# Altium PCB PCB4.PcbDoc (part 1 of 5)
Units mm, origin at the board's own origin, x right, y up, seen from the top; angles counter-clockwise.
Board outline 240 x 180 mm, 2 copper layers (Top Layer, Bottom Layer); 259 components, 311 nets, 1128 pads, 419 vias.
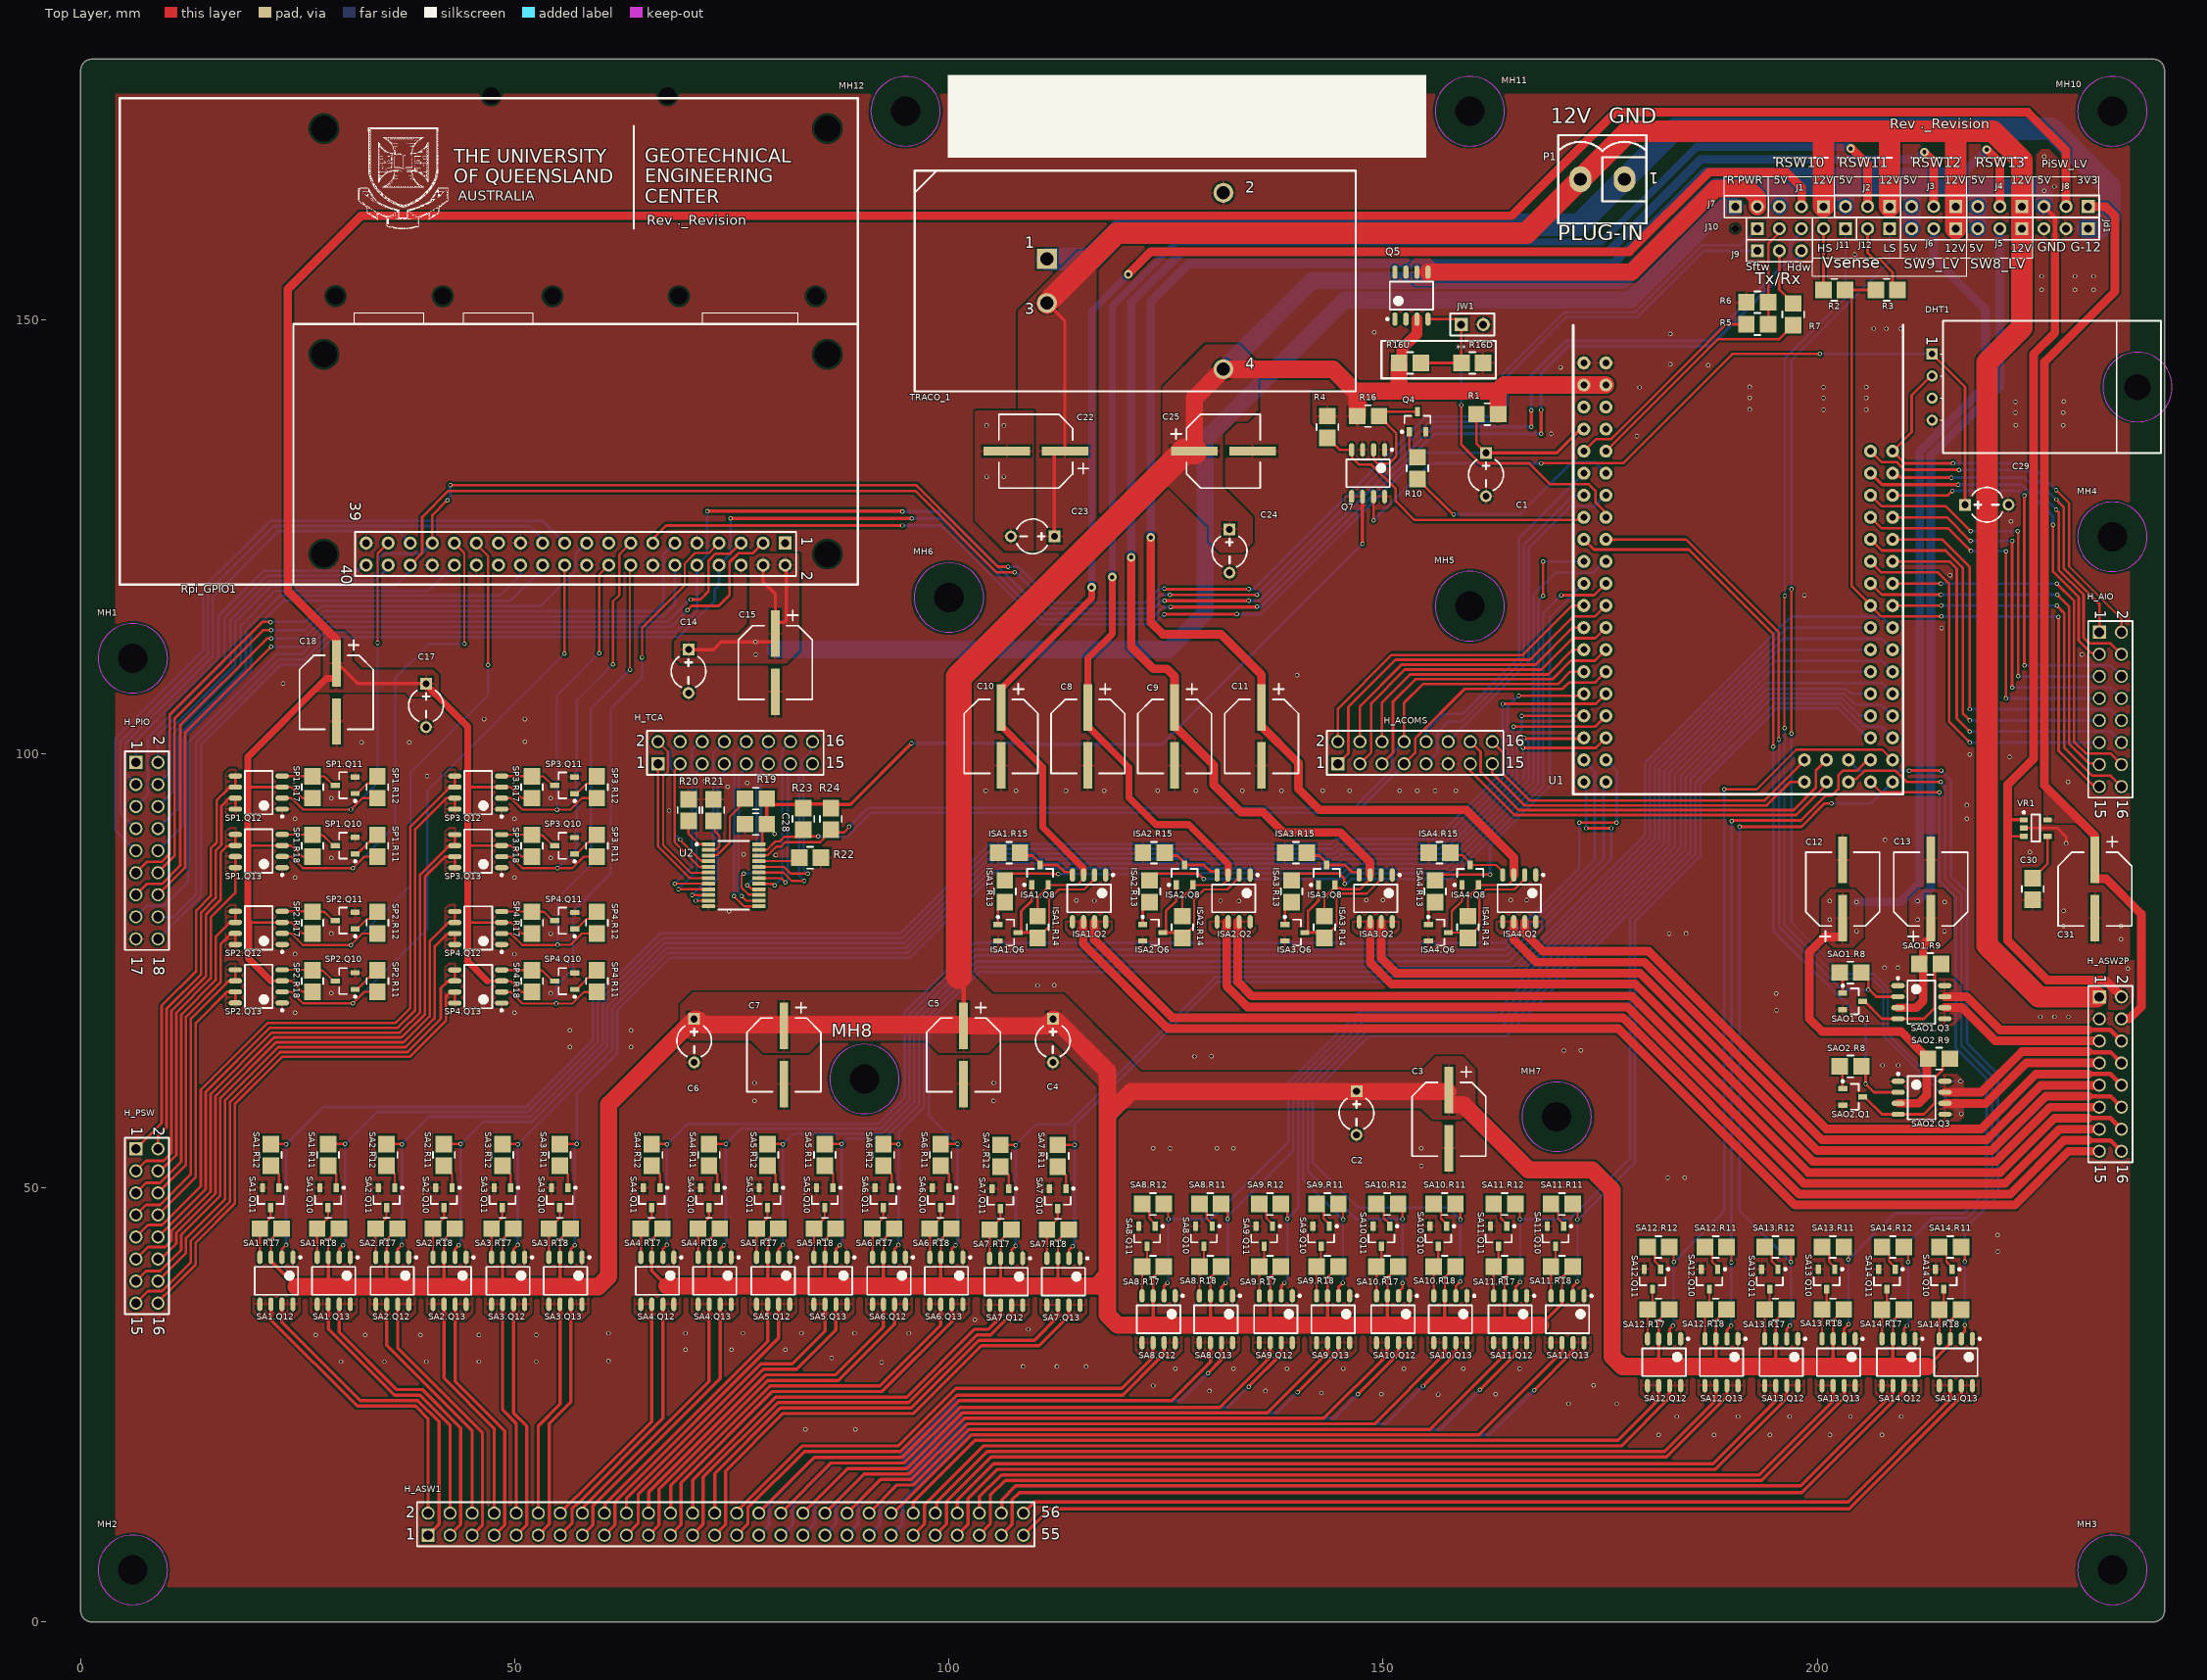
[diagram p0: Top Layer view]
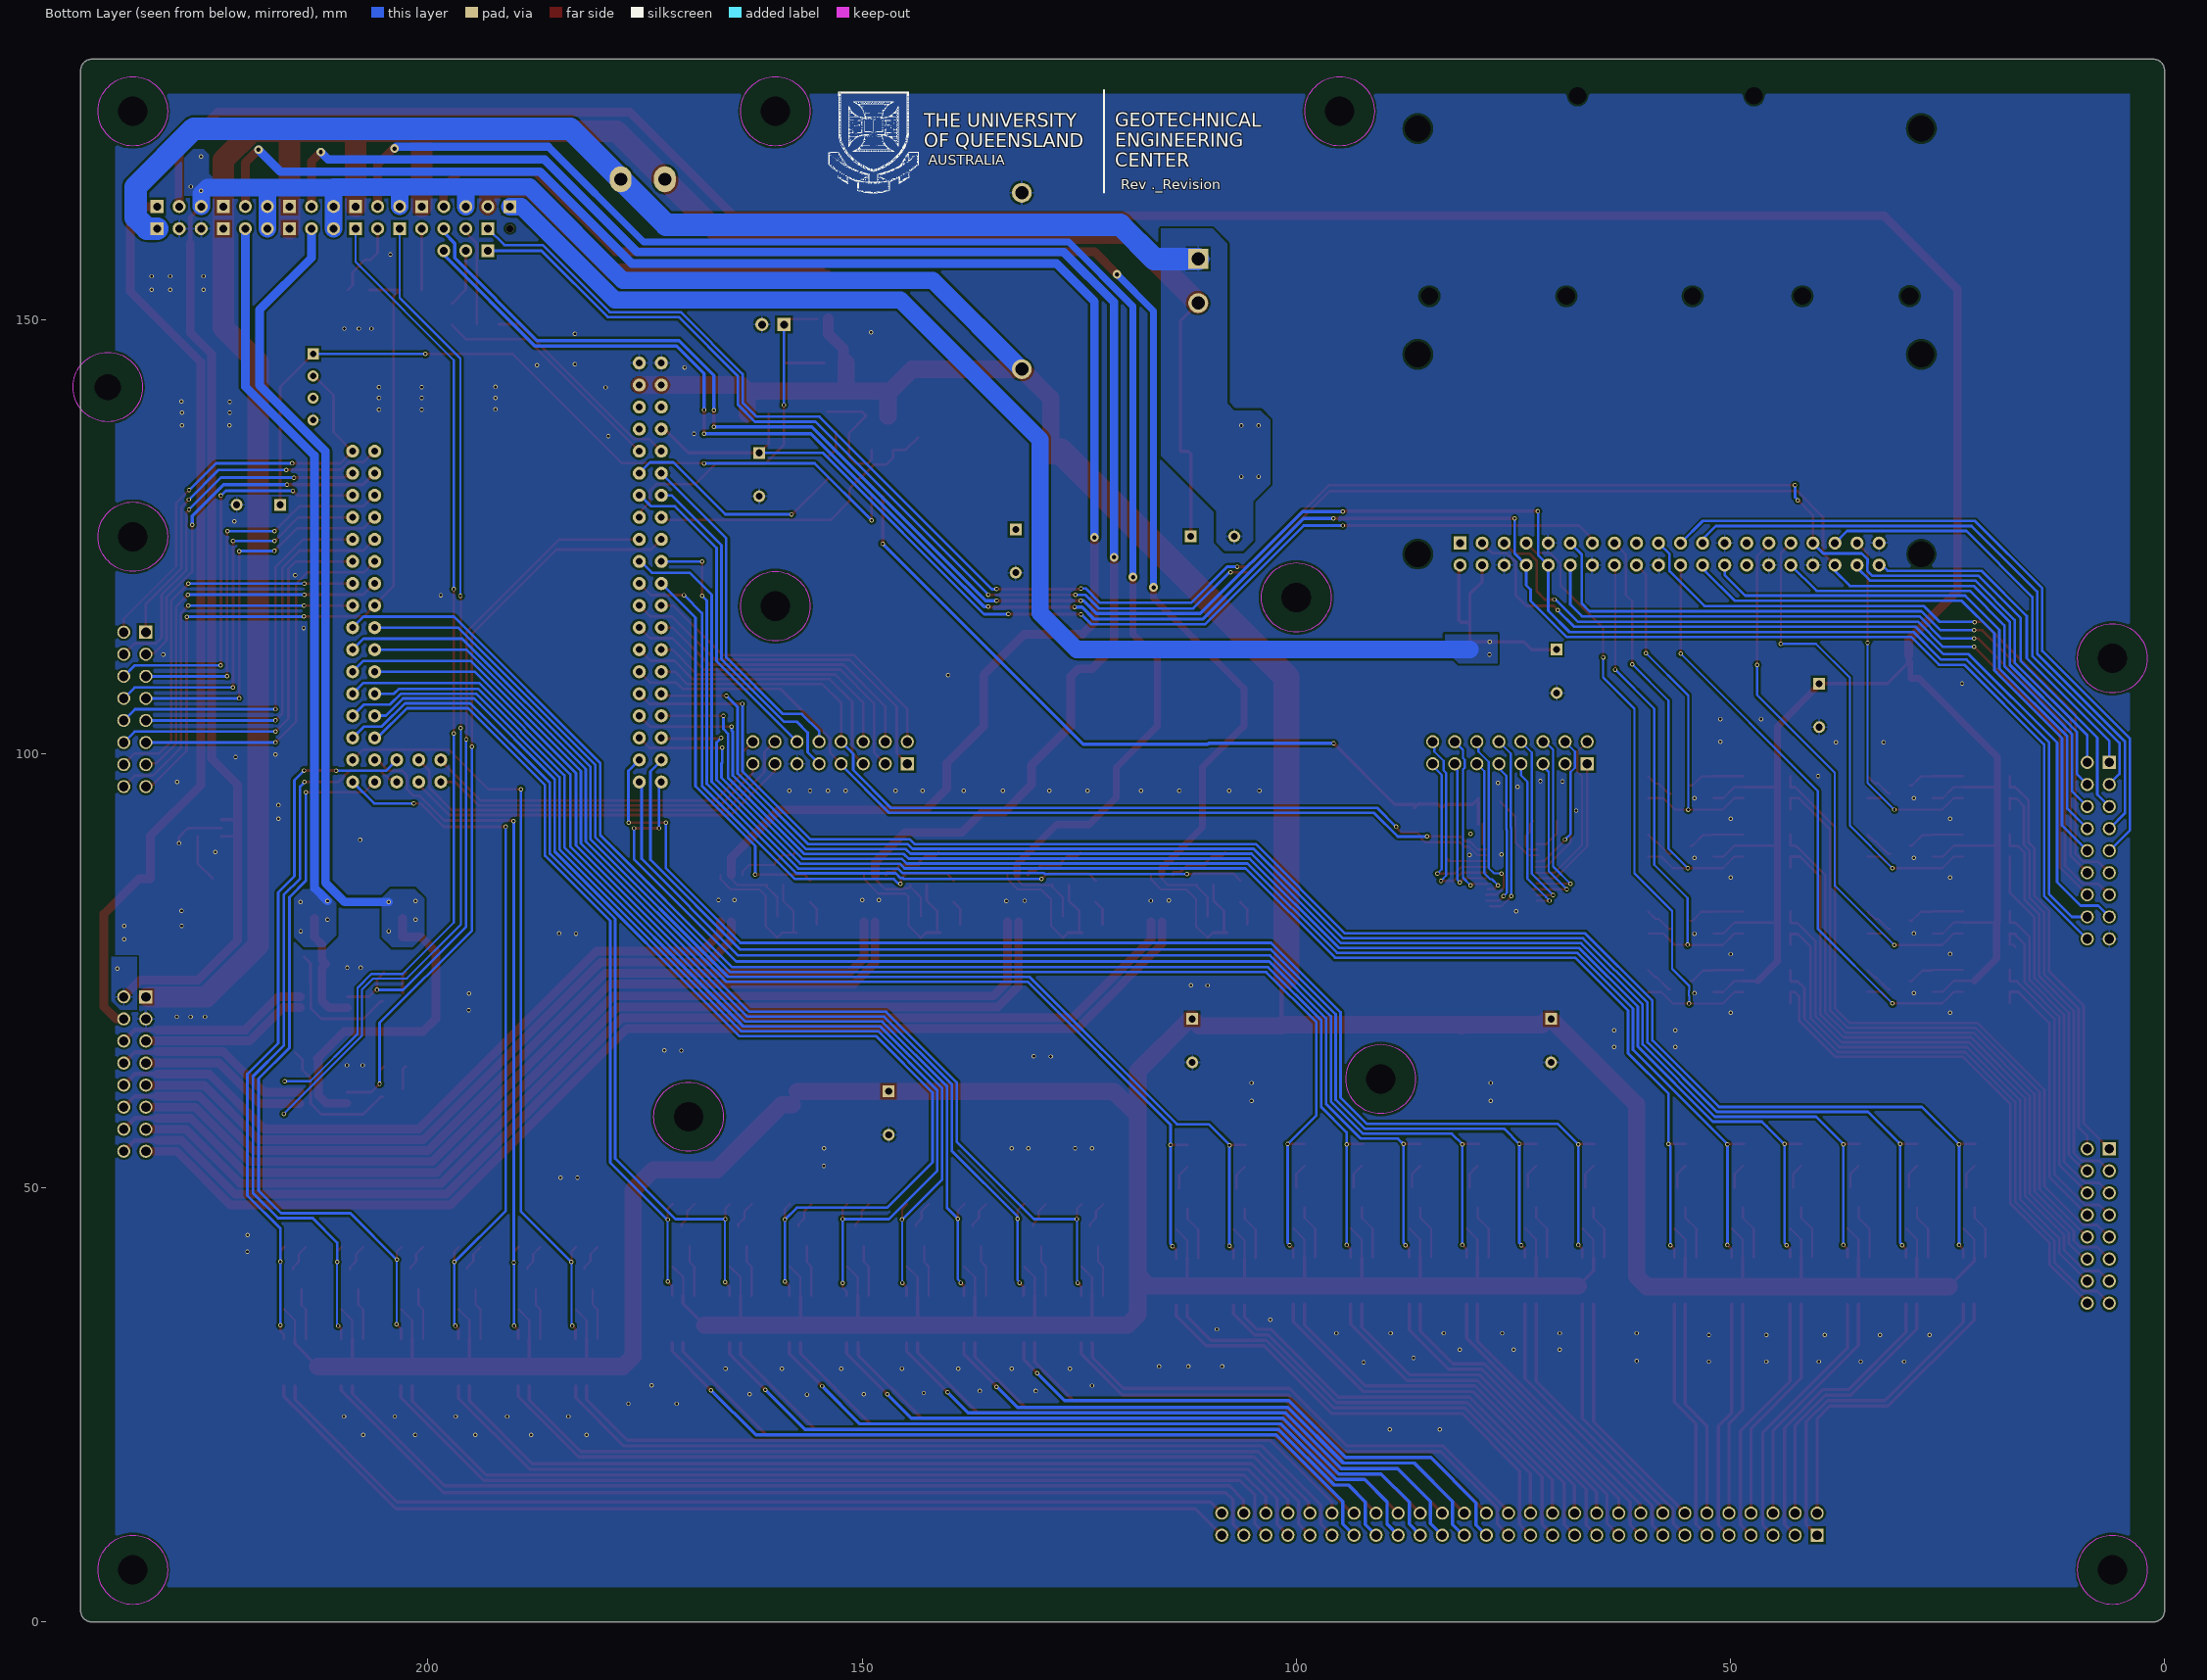
[diagram p1: Bottom Layer view, seen from below]
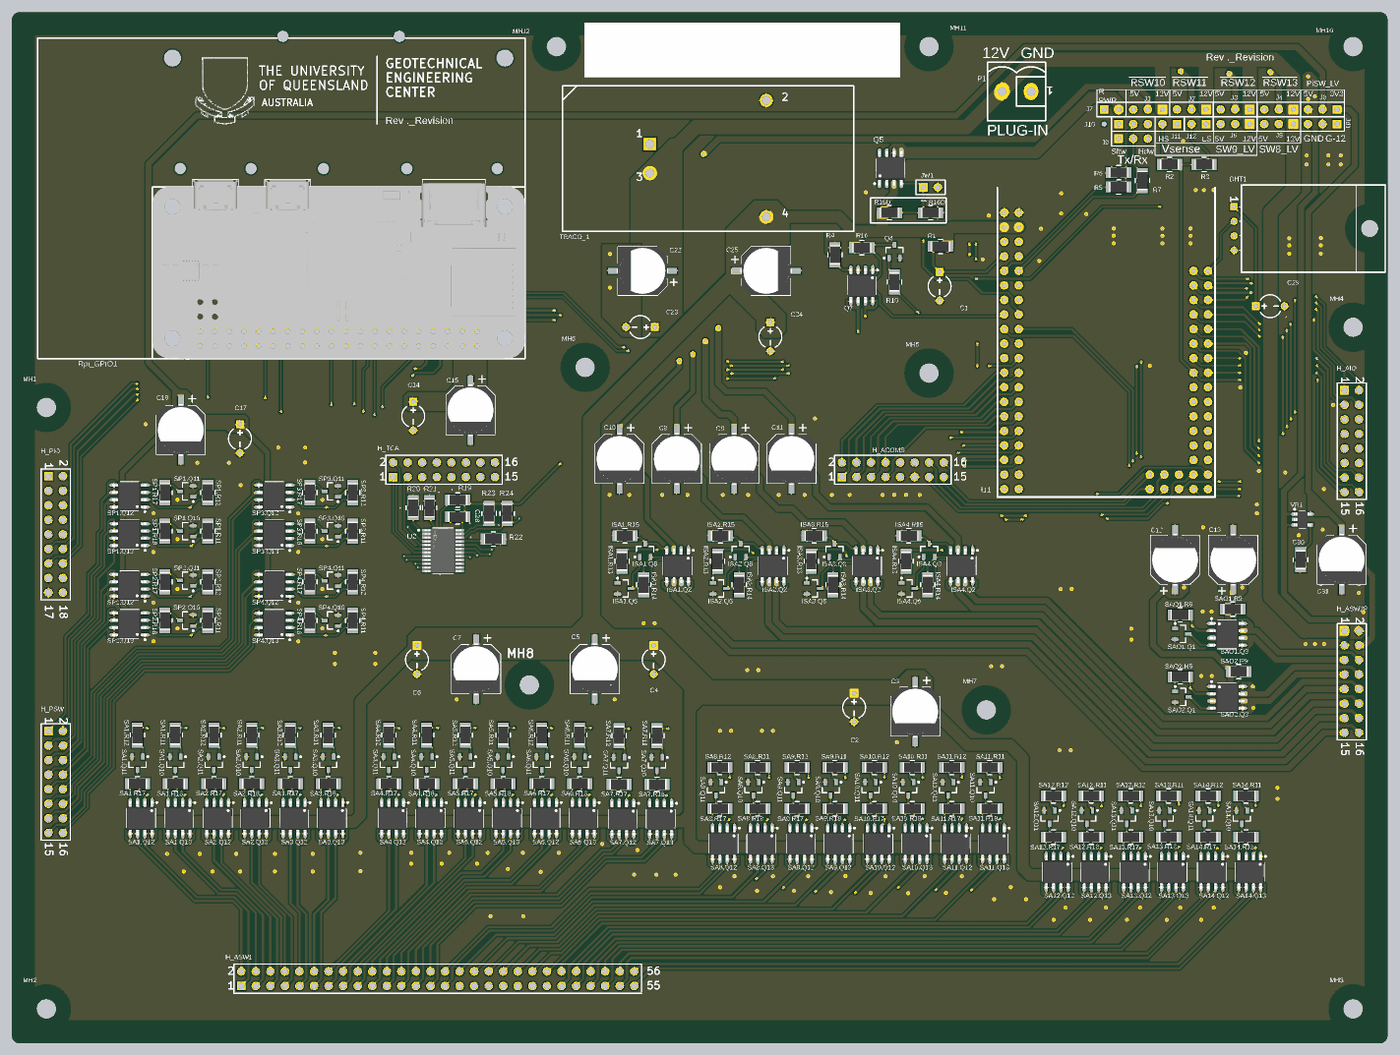
[diagram p5: 3D render of the assembled board from above, using the file's embedded part models]

## Layer stack, top to bottom
Top Solder: solder mask 0.0102, Solder Resist, Dk 3.5
Top Layer: signal copper 0.0711
Dielectric 1: dielectric 0.32, FR-4, Dk 4.8
Bottom Layer: signal copper 0.0711
Bottom Solder: solder mask 0.0102, Solder Resist, Dk 3.5

## Board outline
0,1.27 0,178.73 cw(c1.27,178.73) 1.27,180 238.73,180 cw(c238.73,178.73) 240,178.73 240,1.27 cw(c238.73,1.27) 238.73,0 1.27,0 cw(c1.27,1.27)

## Design rules (kind name [scope] priority, off if disabled: settings)
Clearance [All] p1: gap=0.254 ignorepadtopadclearanceinfootprint=TRUE except(0: Arc-Hole Track-Hole SMDPad-Hole THPad-Hole Via-Hole Fill-Hole Poly-Hole Region-Hole Text-Hole)
DiffPairsRouting [All] p1: maxlimit=0.254 minlimit=0.254 mostfreqgap=0.254 toplayer_minwidth=0.381 toplayer_maxwidth=0.381 toplayer_prefwidth=0.381 bottomlayer_minwidth=0.381 bottomlayer_maxwidth=0.381 bottomlayer_prefwidth=0.381 substack1={883D423E-56AE-4466-9844-C03A0C0BE591} toplayer_{883d423e-56ae-4466-9844-c03a0c0be591}_minwidth=0.381 toplayer_{883d423e-56ae-4466-9844-c03a0c0be591}_maxwidth=0.381 toplayer_{883d423e-56ae-4466-9844-c03a0c0be591}_prefwidth=0.381 bottomlayer_{883d423e-56ae-4466-9844-c03a0c0be591}_minwidth=0.381 bottomlayer_{883d423e-56ae-4466-9844-c03a0c0be591}_maxwidth=0.381 bottomlayer_{883d423e-56ae-4466-9844-c03a0c0be591}_prefwidth=0.381 substack2={A47AA19C-CFCE-4912-B52C-DE35516F46D4} toplayer_{a47aa19c-cfce-4912-b52c-de35516f46d4}_minwidth=0.381 toplayer_{a47aa19c-cfce-4912-b52c-de35516f46d4}_maxwidth=0.381 toplayer_{a47aa19c-cfce-4912-b52c-de35516f46d4}_prefwidth=0.381 bottomlayer_{a47aa19c-cfce-4912-b52c-de35516f46d4}_minwidth=0.381 bottomlayer_{a47aa19c-cfce-4912-b52c-de35516f46d4}_maxwidth=0.381 bottomlayer_{a47aa19c-cfce-4912-b52c-de35516f46d4}_prefwidth=0.381 substack3={BF204D6F-C502-4D5F-91DA-9A976DEDF0E8} toplayer_{bf204d6f-c502-4d5f-91da-9a976dedf0e8}_minwidth=0.381 toplayer_{bf204d6f-c502-4d5f-91da-9a976dedf0e8}_maxwidth=0.381 toplayer_{bf204d6f-c502-4d5f-91da-9a976dedf0e8}_prefwidth=0.381 bottomlayer_{bf204d6f-c502-4d5f-91da-9a976dedf0e8}_minwidth=0.381 bottomlayer_{bf204d6f-c502-4d5f-91da-9a976dedf0e8}_maxwidth=0.381 bottomlayer_{bf204d6f-c502-4d5f-91da-9a976dedf0e8}_prefwidth=0.381 maxuncoupledlength=12.7
Height [All] p1: minheight=0 maxheight=254 prefheight=254
HoleSize [All] p1: absolutevalues=TRUE maxlimit=6.3 minlimit=0.3 maxpercent=80.000 minpercent=20.000
PlaneConnect [All] p1: planeconnectstyle=Relief reliefexpansion=0.508 reliefentries=4 reliefconductorwidth=0.3 reliefairgap=0.254
PolygonConnect [All] p1: thpad.connectstyle=Relief thpad.reliefconductorwidth=0.254 thpad.reliefentries=4 thpad.polygonreliefangle="90 Angle" thpad.airgapwidth=0.254 smdpad.connectstyle=Relief smdpad.reliefconductorwidth=0.254 smdpad.reliefentries=4 smdpad.polygonreliefangle="90 Angle" smdpad.airgapwidth=0.254 via.connectstyle=Direct via.reliefconductorwidth=0.254 via.reliefentries=4 via.polygonreliefangle="90 Angle" via.airgapwidth=0.254
RoomDefinition SP3 [InComponentClass('SP3')] p1: confinementstyle=ConfineIn formatcopy=FALSE lockcomponents=FALSE outline 41.825,85.528 61.177,85.528 61.177,99.118 41.825,99.118
RoomDefinition SP1 [InComponentClass('SP1')] p2: confinementstyle=ConfineIn formatcopy=FALSE lockcomponents=FALSE outline 16.55,85.536 35.902,85.536 35.902,99.126 16.55,99.126
RoomDefinition SP2 [InComponentClass('SP2')] p3: confinementstyle=ConfineIn formatcopy=FALSE lockcomponents=FALSE outline 16.55,69.947 35.902,69.947 35.902,83.537 16.55,83.537
RoomDefinition SP4 [InComponentClass('SP4')] p4: confinementstyle=ConfineIn formatcopy=FALSE lockcomponents=FALSE outline 41.827,69.937 61.179,69.937 61.179,83.527 41.827,83.527
RoomDefinition ISA1 [InComponentClass('ISA1')] p5: confinementstyle=ConfineIn formatcopy=TRUE lockcomponents=FALSE outline 103.959,76.771 119.395,76.771 119.395,90.327 103.959,90.327
RoomDefinition ISA2 [InComponentClass('ISA2')] p6: confinementstyle=ConfineIn formatcopy=TRUE lockcomponents=FALSE outline 120.616,76.771 136.052,76.771 136.052,90.327 120.616,90.327
RoomDefinition ISA3 [InComponentClass('ISA3')] p7: confinementstyle=ConfineIn formatcopy=TRUE lockcomponents=FALSE outline 136.984,76.771 152.42,76.771 152.42,90.327 136.984,90.327
RoomDefinition ISA4 [InComponentClass('ISA4')] p8: confinementstyle=ConfineIn formatcopy=FALSE lockcomponents=FALSE outline 153.514,76.771 168.95,76.771 168.95,90.327 153.514,90.327
RoomDefinition SI-SH [InComponentClass('SI-SH')] p9: confinementstyle=ConfineIn formatcopy=TRUE lockcomponents=FALSE outline 141.859,134.667 141.859,140.625 145.301,140.625 145.301,140.626 151.259,140.626 151.259,140.439 155.995,140.439 155.995,136.031 155.695,136.031 155.695,129.931 151.529,129.931 151.529,128.356 145.241,128.356 145.241,134.667
RoomDefinition SA8 [InComponentClass('SA8')] p10: confinementstyle=ConfineIn formatcopy=TRUE lockcomponents=FALSE outline 120.513,30.913 134.011,30.913 134.011,49.869 120.513,49.869
RoomDefinition SA9 [InComponentClass('SA9')] p11: confinementstyle=ConfineIn formatcopy=TRUE lockcomponents=FALSE outline 134.009,30.913 147.507,30.913 147.507,49.869 134.009,49.869
RoomDefinition SA10 [InComponentClass('SA10')] p12: confinementstyle=ConfineIn formatcopy=TRUE lockcomponents=FALSE outline 147.507,30.913 161.005,30.913 161.005,49.869 147.507,49.869
RoomDefinition SA11 [InComponentClass('SA11')] p13: confinementstyle=ConfineIn formatcopy=TRUE lockcomponents=FALSE outline 161.007,30.912 174.505,30.912 174.505,49.868 161.007,49.868
RoomDefinition SA12 [InComponentClass('SA12')] p14: confinementstyle=ConfineIn formatcopy=TRUE lockcomponents=FALSE outline 178.734,25.963 192.232,25.963 192.232,44.919 178.734,44.919
RoomDefinition SA13 [InComponentClass('SA13')] p15: confinementstyle=ConfineIn formatcopy=TRUE lockcomponents=FALSE outline 192.232,25.963 205.73,25.963 205.73,44.919 192.232,44.919
RoomDefinition SAO2 [InComponentClass('SAO2')] p16: confinementstyle=ConfineIn formatcopy=TRUE lockcomponents=FALSE outline 200.864,57.351 217.004,57.351 217.004,66.619 200.864,66.619
RoomDefinition SA1 [InComponentClass('SA1')] p17: confinementstyle=ConfineIn formatcopy=FALSE lockcomponents=FALSE outline 19.06,35.344 32.402,35.344 32.402,56.778 19.06,56.778
RoomDefinition SA2 [InComponentClass('SA2')] p18: confinementstyle=ConfineIn formatcopy=FALSE lockcomponents=FALSE outline 32.402,35.344 45.744,35.344 45.744,56.778 32.402,56.778
RoomDefinition SA3 [InComponentClass('SA3')] p19: confinementstyle=ConfineIn formatcopy=FALSE lockcomponents=FALSE outline 45.744,35.344 59.086,35.344 59.086,56.778 45.744,56.778
RoomDefinition SA4 [InComponentClass('SA4')] p20: confinementstyle=ConfineIn formatcopy=FALSE lockcomponents=FALSE outline 62.932,35.344 76.274,35.344 76.274,56.778 62.932,56.778
RoomDefinition SA5 [InComponentClass('SA5')] p21: confinementstyle=ConfineIn formatcopy=FALSE lockcomponents=FALSE outline 76.272,35.344 89.614,35.344 89.614,56.778 76.272,56.778
RoomDefinition SA6 [InComponentClass('SA6')] p22: confinementstyle=ConfineIn formatcopy=FALSE lockcomponents=FALSE outline 89.614,35.344 102.956,35.344 102.956,56.778 89.614,56.778
RoomDefinition SA14 [InComponentClass('SA14')] p23: confinementstyle=ConfineIn formatcopy=TRUE lockcomponents=FALSE outline 205.73,25.961 219.228,25.961 219.228,44.917 205.73,44.917
RoomDefinition SAO1 [InComponentClass('SAO1')] p24: confinementstyle=ConfineIn formatcopy=TRUE lockcomponents=FALSE outline 200.854,68.359 215.98,68.359 215.98,77.531 200.854,77.531
RoomDefinition SA7 [InComponentClass('SA7')] p25: confinementstyle=ConfineIn formatcopy=FALSE lockcomponents=FALSE outline 103.103,35.239 116.445,35.239 116.445,56.673 103.103,56.673
RoomDefinition SR [InComponentClass('SR')] p26: confinementstyle=ConfineIn formatcopy=TRUE lockcomponents=FALSE outline 150.029,137.64 163.26,137.64 163.26,168.689 150.029,168.689
RoutingVias [All] p1: holewidth=0.3 width=0.6 viastyle="Through Hole" minholewidth=0.3 minwidth=0.5 maxholewidth=1 maxwidth=2
SolderMaskExpansion [All] p1: expansion=0.102 istentingtop=FALSE
UnConnectedPin [All] p1:
UnRoutedNet [All] p1: checkbadconnections=TRUE
Width [All] p1: maxlimit=5 minlimit=0.152 preferedwidth=0.305 substack1={883D423E-56AE-4466-9844-C03A0C0BE591} substack2={A47AA19C-CFCE-4912-B52C-DE35516F46D4} substack3={BF204D6F-C502-4D5F-91DA-9A976DEDF0E8} minimp=50.000000 maximp=50.000000 favimp=50.000000
25 further rules are at their usual default settings.

## Classes and differential pairs
net class 5V_LS_[1..28]: 5V_LS_1 5V_LS_2 5V_LS_3 5V_LS_4 5V_LS_5 5V_LS_6 5V_LS_7 5V_LS_8 5V_LS_9 5V_LS_10 5V_LS_11 5V_LS_12 5V_LS_13 5V_LS_14 5V_LS_15 5V_LS_16 5V_LS_17 5V_LS_18 5V_LS_19 5V_LS_20 5V_LS_21 5V_LS_22 5V_LS_23 5V_LS_24 5V_LS_25 5V_LS_26 5V_LS_27 5V_LS_28
net class 5V_HS_[1..28]: 5V_HS_1 5V_HS_2 5V_HS_3 5V_HS_4 5V_HS_5 5V_HS_6 5V_HS_7 5V_HS_8 5V_HS_9 5V_HS_10 5V_HS_11 5V_HS_12 5V_HS_13 5V_HS_14 5V_HS_15 5V_HS_16 5V_HS_17 5V_HS_18 5V_HS_19 5V_HS_20 5V_HS_21 5V_HS_22 5V_HS_23 5V_HS_24 5V_HS_25 5V_HS_26 5V_HS_27 5V_HS_28
net class 5V12V_LS_[1..2]: 5V12V_LS_1 5V12V_LS_2
net class 5V12V_HS_[1..2]: 5V12V_HS_1 5V12V_HS_2
net class PI_LS_[1..8]: PI_LS_1 PI_LS_2 PI_LS_3 PI_LS_4 PI_LS_5 PI_LS_6 PI_LS_7 PI_LS_8
net class PWM[1..2]: PWM1 PWM2
net class PI_HS_[1..8]: PI_HS_1 PI_HS_2 PI_HS_3 PI_HS_4 PI_HS_5 PI_HS_6 PI_HS_7 PI_HS_8
net class INV_5V12V_LS_[1..4]: INV_5V12V_LS_1 INV_5V12V_LS_2 INV_5V12V_LS_3 INV_5V12V_LS_4
net class INV_5V12V_HS_[1..4]: INV_5V12V_HS_1 INV_5V12V_HS_2 INV_5V12V_HS_3 INV_5V12V_HS_4
net class AD[0..15]: AD0 AD1 AD2 AD3 AD4 AD5 AD6 AD7 AD8 AD9 AD10 AD11 AD12 AD13 AD14 AD15
component class SR: JW1 Q5 R16D R16U
component class SI-SH: Q4 Q7 R4 R10 R16
channel class Inverted_HS_LS_switch_HI_PWR: ISA1 ISA2 ISA3 ISA4
channel class HS_LS_Switch_LOW_PWR: SA1 SA2 SA3 SA4 SA5 SA6 SA7 SA8 SA9 SA10 SA11 SA12 SA13 SA14 SP1 SP2 SP3 SP4
channel class HS_LS_switch_HI_PWR: SAO1 SAO2
component class ISA4: ISA4.Q2 ISA4.Q6 ISA4.Q8 ISA4.R13 ISA4.R14 ISA4.R15
component class ISA3: ISA3.Q2 ISA3.Q6 ISA3.Q8 ISA3.R13 ISA3.R14 ISA3.R15
component class SAO2: SA02.R4 SAO2.Q1 SAO2.Q3 SAO2.R8 SAO2.R9
component class SAO1: SA01.R4 SAO1.Q1 SAO1.Q3 SAO1.R8 SAO1.R9
component class ISA2: ISA2.Q2 ISA2.Q6 ISA2.Q8 ISA2.R13 ISA2.R14 ISA2.R15
component class ISA1: ISA1.Q2 ISA1.Q6 ISA1.Q8 ISA1.R13 ISA1.R14 ISA1.R15
component class SP4: SP4.Q10 SP4.Q11 SP4.Q12 SP4.Q13 SP4.R11 SP4.R12 SP4.R17 SP4.R18
component class SP3: SP3.Q10 SP3.Q11 SP3.Q12 SP3.Q13 SP3.R11 SP3.R12 SP3.R17 SP3.R18
component class SP2: SP2.Q10 SP2.Q11 SP2.Q12 SP2.Q13 SP2.R11 SP2.R12 SP2.R17 SP2.R18
component class "Top level": C22 C23 C24 C25 C28 C29 C30 C31 DHT1 H_ACOMS H_AIO H_ASW1 H_ASW2P H_PIO H_PSW H_TCA J7 J9 J10 Jd1 MH1 MH2 MH3 MH4 MH5 MH6 MH7 MH8 MH10 MH11 MH12 P1 P30 P? R5 R6 R7 R19 R20 R21 R22 R23 R24 TRACO_1 U2 VR1
component class SA14: SA14.Q10 SA14.Q11 SA14.Q12 SA14.Q13 SA14.R11 SA14.R12 SA14.R17 SA14.R18
component class SA13: SA13.Q10 SA13.Q11 SA13.Q12 SA13.Q13 SA13.R11 SA13.R12 SA13.R17 SA13.R18
component class SA12: SA12.Q10 SA12.Q11 SA12.Q12 SA12.Q13 SA12.R11 SA12.R12 SA12.R17 SA12.R18
component class SA11: SA11.Q10 SA11.Q11 SA11.Q12 SA11.Q13 SA11.R11 SA11.R12 SA11.R17 SA11.R18
component class SA10: SA10.Q10 SA10.Q11 SA10.Q12 SA10.Q13 SA10.R11 SA10.R12 SA10.R17 SA10.R18
component class SA9: SA9.Q10 SA9.Q11 SA9.Q12 SA9.Q13 SA9.R11 SA9.R12 SA9.R17 SA9.R18
component class SA8: SA8.Q10 SA8.Q11 SA8.Q12 SA8.Q13 SA8.R11 SA8.R12 SA8.R17 SA8.R18
component class SA7: SA7.Q10 SA7.Q11 SA7.Q12 SA7.Q13 SA7.R11 SA7.R12 SA7.R17 SA7.R18
component class SA6: SA6.Q10 SA6.Q11 SA6.Q12 SA6.Q13 SA6.R11 SA6.R12 SA6.R17 SA6.R18
component class SA5: SA5.Q10 SA5.Q11 SA5.Q12 SA5.Q13 SA5.R11 SA5.R12 SA5.R17 SA5.R18
component class SA4: SA4.Q10 SA4.Q11 SA4.Q12 SA4.Q13 SA4.R11 SA4.R12 SA4.R17 SA4.R18
component class SA3: SA3.Q10 SA3.Q11 SA3.Q12 SA3.Q13 SA3.R11 SA3.R12 SA3.R17 SA3.R18
component class SA2: SA2.Q10 SA2.Q11 SA2.Q12 SA2.Q13 SA2.R11 SA2.R12 SA2.R17 SA2.R18
component class SA1: SA1.Q10 SA1.Q11 SA1.Q12 SA1.Q13 SA1.R11 SA1.R12 SA1.R17 SA1.R18
component class RPi_schematics: C14 C15 C17 C18 J8 Rpi_GPIO1
component class SP1: SP1.Q10 SP1.Q11 SP1.Q12 SP1.Q13 SP1.R11 SP1.R12 SP1.R17 SP1.R18
component class Arduino_2560_schematics: C1 C2 C3 C4 C5 C6 C7 C8 C9 C10 C11 C12 C13 J1 J2 J3 J4 J5 J6 J11 J12 R1 R2 R3 SP1

## Components (designator, comment, footprint, x,y, rotation, side; value= is the part's Value field where it differs from the comment)
C1 "1u" CAPR5-4X5 161.854,132.16 r270 top
C2 "1u" CAPR5-4X5 146.942,58.61 r270 top
C3 "10u" CAPAE9083X80M 157.586,57.9 r270 top
C4 "1u" CAPR5-4X5 111.971,66.954 r270 top
C5 "10u" CAPAE9083X80M 101.684,65.312 r270 top
C6 "1u" CAPR5-4X5 70.654,66.954 r270 top
C7 "10u" CAPAE9083X80M 80.987,65.312 r270 top
C8 "10u" CAPAE9083X80M 116,102 r270 top
C9 "10u" CAPAE9083X80M 126,102 r270 top
C10 "10u" CAPAE9083X80M 106,102 r270 top
C11 "10u" CAPAE9083X80M 136,102 r270 top
C12 "10u" CAPAE9083X80M 202.934,84.42 r90 top
C13 "10u" CAPAE9083X80M 213.08,84.42 r90 top
C14 "220u" CAPR5-4X5 70.004,109.5 r270 top
C15 "220u" CAPAE9083X80M 80.004,110.5 r270 top
C17 "1u" CAPR5-4X5 39.774,105.574 r270 top
C18 "220u" CAPAE9083X80M 29.444,107.071 r270 top
C22 "220u" CAPAE9083X80M 110,134.848 r180 top
C23 "220u" CAPR5-4X5 109.639,125.037 r180 top
C24 "220u" CAPR5-4X5 132.318,123.35 r270 top
C25 "220u" CAPAE9083X80M 131.614,134.848 r0 top
C28 "10u" RES-1206_M 77.766,91.905 r180 top
C29 "10u" CAPR5-4X5 219.53,128.68 r0 top
C30 "470p" RES-1206_M 224.83,84.42 r270 top
C31 "10u" CAPAE9083X80M 231.994,84.42 r270 top
DHT1 "DHT22" DHT22_HORIZONTAL 213.234,142.24 r270 top
H_ACOMS "Recepticle 8X2" HDR2X8 144.8,98.85 r0 top
H_AIO "Recepticle 8X2" HDR2X8 232.5,114 r270 top
H_ASW1 "Recepticle 28X2" HDR2X28 40,10 r0 top
H_ASW2P "Recepticle 8X2" HDR2X8 232.5,72 r270 top
H_PIO "Recepticle 9X2" HDR2X9 6.35,99 r270 top
H_PSW "Recepticle 8X2" HDR2X8 6.35,54.5 r270 top
H_TCA "Recepticle 8X2" HDR2X8 66.5,98.85 r0 top locked
ISA1.Q2 "DMC3016LSD" SOIC-8_SOIC127P600X175-8N 116.134,83.347 r270 top (schematic designator Q2)
ISA1.Q6 "BC848B" SOT23_N 106.809,79.4 r0 top (schematic designator Q6)
ISA1.Q8 "NTR1P02" SOT23_N 110.485,86.047 r90 top (schematic designator Q8)
ISA1.R13 "390k" RES-1206_M 106.439,84.16 r270 top (schematic designator R13)
ISA1.R14 "120k" RES-1206_M 110.22,80.05 r90 top (schematic designator R14)
ISA1.R15 "120k" RES-1206_M 106.939,88.597 r180 top (schematic designator R15)
ISA2.Q2 "DMC3016LSD" SOIC-8_SOIC127P600X175-8N 132.791,83.347 r270 top (schematic designator Q2)
ISA2.Q6 "BC848B" SOT23_N 123.466,79.4 r0 top (schematic designator Q6)
ISA2.Q8 "NTR1P02" SOT23_N 127.142,86.047 r90 top (schematic designator Q8)
ISA2.R13 "390k" RES-1206_M 123.097,84.16 r270 top (schematic designator R13)
ISA2.R14 "120k" RES-1206_M 126.878,80.05 r90 top (schematic designator R14)
ISA2.R15 "120k" RES-1206_M 123.597,88.597 r180 top (schematic designator R15)
ISA3.Q2 "DMC3016LSD" SOIC-8_SOIC127P600X175-8N 149.159,83.347 r270 top (schematic designator Q2)
ISA3.Q6 "BC848B" SOT23_N 139.834,79.4 r0 top (schematic designator Q6)
ISA3.Q8 "NTR1P02" SOT23_N 143.51,86.047 r90 top (schematic designator Q8)
ISA3.R13 "390k" RES-1206_M 139.464,84.16 r270 top (schematic designator R13)
ISA3.R14 "120k" RES-1206_M 143.245,80.05 r90 top (schematic designator R14)
ISA3.R15 "120k" RES-1206_M 139.964,88.597 r180 top (schematic designator R15)
ISA4.Q2 "DMC3016LSD" SOIC-8_SOIC127P600X175-8N 165.689,83.347 r270 top (schematic designator Q2)
ISA4.Q6 "BC848B" SOT23_N 156.364,79.4 r0 top (schematic designator Q6)
ISA4.Q8 "NTR1P02" SOT23_N 160.04,86.047 r90 top (schematic designator Q8)
ISA4.R13 "390k" RES-1206_M 155.994,84.16 r270 top (schematic designator R13)
ISA4.R14 "120k" RES-1206_M 159.775,80.05 r90 top (schematic designator R14)
ISA4.R15 "120k" RES-1206_M 156.494,88.597 r180 top (schematic designator R15)
J1 "5V-12V Jumper" HDR1X3 200.723,163.02 r180 top
J2 "5V-12V Jumper" HDR1X3 208.343,163.03 r180 top
J3 "5V-12V Jumper" HDR1X3 215.963,163.03 r180 top
J4 "5V-12V Jumper" HDR1X3 223.583,163.03 r180 top
J5 "Header 3" HDR1X3 223.583,160.48 r180 top
J6 "Header 3" HDR1X3 215.963,160.48 r180 top
J7 "Header 2" HDR1X2 190.563,163.02 r0 top
J8 "Header 3" HDR1X3 231.203,163.03 r180 top
J9 "Header 3" HDR1X3 193.103,157.94 r0 top
J10 "Header 3" HDR1X3 193.103,160.48 r0 top
J11 "Header 2" HDR1X2 203.263,160.48 r180 top
J12 "Header 2" HDR1X2 208.343,160.48 r180 top
Jd1 "5V-12V Jumper" HDR1X3 231.203,160.48 r180 top
JW1 "Header 2" HDR1X2 159.006,149.44 r0 top
MH1 "MOUNTING_HOLE" M3 6,111 r0 top
MH2 "MOUNTING_HOLE" M3 6,6 r0 top
MH3 "MOUNTING_HOLE" M3 234,6 r0 top
MH4 "MOUNTING_HOLE" M3 234,125 r0 top
MH5 "MOUNTING_HOLE" M3 160,117 r0 top
MH6 "MOUNTING_HOLE" M3 100,118 r0 top
MH7 "MOUNTING_HOLE" M3 170,58.2 r0 top
MH8 "MOUNTING_HOLE" M3 90.275,62.546 r0 top
MH10 "MOUNTING_HOLE" M3 234,174 r0 top
MH11 "MOUNTING_HOLE" M3 160,174 r0 top
MH12 "MOUNTING_HOLE" M3 95,174 r0 top
P1 "PLUG IN" PHOENIX_2PIN 175.264,166.168 r180 top
Q4 "BC848B" SOT23_N 153.966,138.235 r90 top
Q5 "DMP3028LSD" SOIC-8_SOIC127P600X175-8N 153.266,152.766 r90 top
Q7 "DMP3028LSD" SOIC-8_SOIC127P600X175-8N 148.27,132.31 r270 top
R1 "10K" RES-1206_M 162,139.11 r0 top
R2 "120k" RES-1206_M 201.973,153.43 r180 top
R3 "39k" RES-1206_M 208,153.43 r180 top
R4 "120k" RES-1206_M 143.588,137.646 r90 top
R5 "2k7" RES-1206_M 193.094,149.49 r0 top
R6 "4k7" RES-1206_M 193.094,152.01 r180 top
R7 "4k7" RES-1206_M 197.237,150.61 r270 top
R10 "390k" RES-1206_M 153.966,132.91 r90 top
R16 "120k" RES-1206_M 148.28,138.897 r180 top
R16D "120k" RES-1206_M 160.274,145.01 r180 top
R16U "120k" RES-1206_M 153.104,145.01 r180 top
R19 "10K" RES-1206_M 77.766,94.836 r180 top
R20 "10K" RES-1206_M 70.004,93.5 r90 top
R21 "10K" RES-1206_M 72.86,93.5 r90 top
R22 "10K" RES-1206_M 84,88.025 r0 top
R23 "10K" RES-1206_M 83.236,92.5 r270 top
R24 "10K" RES-1206_M 86.402,92.5 r270 top
Rpi_GPIO1 "Rpi_GPIO" RPI_Z_GPIO_HDR2X20 81.13,124.27 r270 top
SA1.Q10 "BC848B" SOT23_N 28.487,48.868 r270 top (schematic designator Q10)
SA1.Q11 "BC848B" SOT23_N 21.883,48.868 r270 top (schematic designator Q11)
SA1.Q12 "DMC3016LSD" SOIC-8_SOIC127P600X175-8N 22.538,39.299 r270 top (schematic designator Q12)
SA1.Q13 "DMC3016LSD" SOIC-8_SOIC127P600X175-8N 29.142,39.299 r270 top (schematic designator Q13)
SA1.R11 "390k" RES-1206_M 28.487,53.799 r270 top (schematic designator R11)
SA1.R12 "390k" RES-1206_M 21.883,53.799 r270 top (schematic designator R12)
SA1.R17 "120k" RES-1206_M 21.883,45.299 r0 top (schematic designator R17)
SA1.R18 "120k" RES-1206_M 28.487,45.299 r0 top (schematic designator R18)
SA2.Q10 "BC848B" SOT23_N 41.829,48.868 r270 top (schematic designator Q10)
SA2.Q11 "BC848B" SOT23_N 35.225,48.868 r270 top (schematic designator Q11)
SA2.Q12 "DMC3016LSD" SOIC-8_SOIC127P600X175-8N 35.88,39.298 r270 top (schematic designator Q12)
SA2.Q13 "DMC3016LSD" SOIC-8_SOIC127P600X175-8N 42.484,39.298 r270 top (schematic designator Q13)
SA2.R11 "390k" RES-1206_M 41.829,53.798 r270 top (schematic designator R11)
SA2.R12 "390k" RES-1206_M 35.225,53.798 r270 top (schematic designator R12)
SA2.R17 "120k" RES-1206_M 35.225,45.298 r0 top (schematic designator R17)
SA2.R18 "120k" RES-1206_M 41.829,45.298 r0 top (schematic designator R18)
SA3.Q10 "BC848B" SOT23_N 55.171,48.868 r270 top (schematic designator Q10)
SA3.Q11 "BC848B" SOT23_N 48.567,48.868 r270 top (schematic designator Q11)
SA3.Q12 "DMC3016LSD" SOIC-8_SOIC127P600X175-8N 49.222,39.298 r270 top (schematic designator Q12)
SA3.Q13 "DMC3016LSD" SOIC-8_SOIC127P600X175-8N 55.826,39.298 r270 top (schematic designator Q13)
SA3.R11 "390k" RES-1206_M 55.171,53.798 r270 top (schematic designator R11)
SA3.R12 "390k" RES-1206_M 48.567,53.798 r270 top (schematic designator R12)
SA3.R17 "120k" RES-1206_M 48.567,45.298 r0 top (schematic designator R17)
SA3.R18 "120k" RES-1206_M 55.171,45.298 r0 top (schematic designator R18)
SA4.Q10 "BC848B" SOT23_N 72.359,48.868 r270 top (schematic designator Q10)
SA4.Q11 "BC848B" SOT23_N 65.755,48.868 r270 top (schematic designator Q11)
SA4.Q12 "DMC3016LSD" SOIC-8_SOIC127P600X175-8N 66.41,39.298 r270 top (schematic designator Q12)
SA4.Q13 "DMC3016LSD" SOIC-8_SOIC127P600X175-8N 73.014,39.298 r270 top (schematic designator Q13)
SA4.R11 "390k" RES-1206_M 72.359,53.798 r270 top (schematic designator R11)
SA4.R12 "390k" RES-1206_M 65.755,53.798 r270 top (schematic designator R12)
SA4.R17 "120k" RES-1206_M 65.755,45.298 r0 top (schematic designator R17)
SA4.R18 "120k" RES-1206_M 72.359,45.298 r0 top (schematic designator R18)
SA5.Q10 "BC848B" SOT23_N 85.699,48.868 r270 top (schematic designator Q10)
SA5.Q11 "BC848B" SOT23_N 79.095,48.868 r270 top (schematic designator Q11)
SA5.Q12 "DMC3016LSD" SOIC-8_SOIC127P600X175-8N 79.75,39.298 r270 top (schematic designator Q12)
SA5.Q13 "DMC3016LSD" SOIC-8_SOIC127P600X175-8N 86.354,39.298 r270 top (schematic designator Q13)
SA5.R11 "390k" RES-1206_M 85.699,53.798 r270 top (schematic designator R11)
SA5.R12 "390k" RES-1206_M 79.095,53.798 r270 top (schematic designator R12)
SA5.R17 "120k" RES-1206_M 79.095,45.298 r0 top (schematic designator R17)
SA5.R18 "120k" RES-1206_M 85.699,45.298 r0 top (schematic designator R18)
SA6.Q10 "BC848B" SOT23_N 99.041,48.868 r270 top (schematic designator Q10)
SA6.Q11 "BC848B" SOT23_N 92.437,48.868 r270 top (schematic designator Q11)
SA6.Q12 "DMC3016LSD" SOIC-8_SOIC127P600X175-8N 93.092,39.298 r270 top (schematic designator Q12)
SA6.Q13 "DMC3016LSD" SOIC-8_SOIC127P600X175-8N 99.696,39.298 r270 top (schematic designator Q13)
SA6.R11 "390k" RES-1206_M 99.041,53.798 r270 top (schematic designator R11)
SA6.R12 "390k" RES-1206_M 92.437,53.798 r270 top (schematic designator R12)
SA6.R17 "120k" RES-1206_M 92.437,45.298 r0 top (schematic designator R17)
SA6.R18 "120k" RES-1206_M 99.041,45.298 r0 top (schematic designator R18)
SA7.Q10 "BC848B" SOT23_N 112.53,48.763 r270 top (schematic designator Q10)
SA7.Q11 "BC848B" SOT23_N 105.927,48.763 r270 top (schematic designator Q11)
SA7.Q12 "DMC3016LSD" SOIC-8_SOIC127P600X175-8N 106.582,39.193 r270 top (schematic designator Q12)
SA7.Q13 "DMC3016LSD" SOIC-8_SOIC127P600X175-8N 113.185,39.193 r270 top (schematic designator Q13)
SA7.R11 "390k" RES-1206_M 112.53,53.693 r270 top (schematic designator R11)
SA7.R12 "390k" RES-1206_M 105.927,53.693 r270 top (schematic designator R12)
SA7.R17 "120k" RES-1206_M 105.927,45.193 r0 top (schematic designator R17)
SA7.R18 "120k" RES-1206_M 112.53,45.193 r0 top (schematic designator R18)
SA8.Q10 "BC848B" SOT23_N 129.365,44.436 r270 top (schematic designator Q10)
SA8.Q11 "BC848B" SOT23_N 122.815,44.436 r270 top (schematic designator Q11)
SA8.Q12 "DMC3016LSD" SOIC-8_SOIC127P600X175-8N 124.148,34.867 r270 top (schematic designator Q12)
SA8.Q13 "DMC3016LSD" SOIC-8_SOIC127P600X175-8N 130.751,34.867 r270 top (schematic designator Q13)
SA8.R11 "390k" RES-1206_M 130.096,48.138 r180 top (schematic designator R11)
SA8.R12 "390k" RES-1206_M 123.493,48.138 r180 top (schematic designator R12)
SA8.R17 "120k" RES-1206_M 123.493,40.938 r0 top (schematic designator R17)
SA8.R18 "120k" RES-1206_M 130.096,40.938 r0 top (schematic designator R18)
SA9.Q10 "BC848B" SOT23_N 142.861,44.436 r270 top (schematic designator Q10)
SA9.Q11 "BC848B" SOT23_N 136.311,44.436 r270 top (schematic designator Q11)
SA9.Q12 "DMC3016LSD" SOIC-8_SOIC127P600X175-8N 137.644,34.867 r270 top (schematic designator Q12)
SA9.Q13 "DMC3016LSD" SOIC-8_SOIC127P600X175-8N 144.247,34.867 r270 top (schematic designator Q13)
SA9.R11 "390k" RES-1206_M 143.592,48.138 r180 top (schematic designator R11)
SA9.R12 "390k" RES-1206_M 136.989,48.138 r180 top (schematic designator R12)
SA9.R17 "120k" RES-1206_M 136.989,40.938 r0 top (schematic designator R17)
SA9.R18 "120k" RES-1206_M 143.592,40.938 r0 top (schematic designator R18)
SA10.Q10 "BC848B" SOT23_N 156.359,44.436 r270 top (schematic designator Q10)
SA10.Q11 "BC848B" SOT23_N 149.809,44.436 r270 top (schematic designator Q11)
SA10.Q12 "DMC3016LSD" SOIC-8_SOIC127P600X175-8N 151.142,34.867 r270 top (schematic designator Q12)
SA10.Q13 "DMC3016LSD" SOIC-8_SOIC127P600X175-8N 157.745,34.867 r270 top (schematic designator Q13)
SA10.R11 "390k" RES-1206_M 157.09,48.138 r180 top (schematic designator R11)
SA10.R12 "390k" RES-1206_M 150.487,48.138 r180 top (schematic designator R12)
SA10.R17 "120k" RES-1206_M 150.487,40.938 r0 top (schematic designator R17)
SA10.R18 "120k" RES-1206_M 157.09,40.938 r0 top (schematic designator R18)
SA11.Q10 "BC848B" SOT23_N 169.859,44.435 r270 top (schematic designator Q10)
SA11.Q11 "BC848B" SOT23_N 163.309,44.435 r270 top (schematic designator Q11)
SA11.Q12 "DMC3016LSD" SOIC-8_SOIC127P600X175-8N 164.642,34.866 r270 top (schematic designator Q12)
SA11.Q13 "DMC3016LSD" SOIC-8_SOIC127P600X175-8N 171.245,34.866 r270 top (schematic designator Q13)
SA11.R11 "390k" RES-1206_M 170.59,48.137 r180 top (schematic designator R11)
SA11.R12 "390k" RES-1206_M 163.987,48.137 r180 top (schematic designator R12)
SA11.R17 "120k" RES-1206_M 163.987,40.937 r0 top (schematic designator R17)
SA11.R18 "120k" RES-1206_M 170.59,40.937 r0 top (schematic designator R18)
SA12.Q10 "BC848B" SOT23_N 187.586,39.486 r270 top (schematic designator Q10)
SA12.Q11 "BC848B" SOT23_N 181.036,39.486 r270 top (schematic designator Q11)
SA12.Q12 "DMC3016LSD" SOIC-8_SOIC127P600X175-8N 182.369,29.917 r270 top (schematic designator Q12)
SA12.Q13 "DMC3016LSD" SOIC-8_SOIC127P600X175-8N 188.972,29.917 r270 top (schematic designator Q13)
SA12.R11 "390k" RES-1206_M 188.317,43.188 r180 top (schematic designator R11)
SA12.R12 "390k" RES-1206_M 181.714,43.188 r180 top (schematic designator R12)
SA12.R17 "120k" RES-1206_M 181.714,35.988 r0 top (schematic designator R17)
SA12.R18 "120k" RES-1206_M 188.317,35.988 r0 top (schematic designator R18)
SA13.Q10 "BC848B" SOT23_N 201.084,39.486 r270 top (schematic designator Q10)
SA13.Q11 "BC848B" SOT23_N 194.534,39.486 r270 top (schematic designator Q11)
SA13.Q12 "DMC3016LSD" SOIC-8_SOIC127P600X175-8N 195.867,29.917 r270 top (schematic designator Q12)
SA13.Q13 "DMC3016LSD" SOIC-8_SOIC127P600X175-8N 202.47,29.917 r270 top (schematic designator Q13)
SA13.R11 "390k" RES-1206_M 201.815,43.188 r180 top (schematic designator R11)
SA13.R12 "390k" RES-1206_M 195.212,43.188 r180 top (schematic designator R12)
SA13.R17 "120k" RES-1206_M 195.212,35.988 r0 top (schematic designator R17)
SA13.R18 "120k" RES-1206_M 201.815,35.988 r0 top (schematic designator R18)
SA14.Q10 "BC848B" SOT23_N 214.582,39.485 r270 top (schematic designator Q10)
SA14.Q11 "BC848B" SOT23_N 208.032,39.485 r270 top (schematic designator Q11)
SA14.Q12 "DMC3016LSD" SOIC-8_SOIC127P600X175-8N 209.365,29.915 r270 top (schematic designator Q12)
SA14.Q13 "DMC3016LSD" SOIC-8_SOIC127P600X175-8N 215.968,29.915 r270 top (schematic designator Q13)
SA14.R11 "390k" RES-1206_M 215.313,43.187 r180 top (schematic designator R11)
SA14.R12 "390k" RES-1206_M 208.71,43.187 r180 top (schematic designator R12)
SA14.R17 "120k" RES-1206_M 208.71,35.987 r0 top (schematic designator R17)
SA14.R18 "120k" RES-1206_M 215.313,35.987 r0 top (schematic designator R18)
SAO1.Q1 "BC848B" SOT23_N 204.084,71.482 r0 top (schematic designator Q1)
SAO1.Q3 "DMC3016LSD" SOIC-8_SOIC127P600X175-8N 212,71.388 r0 top (schematic designator Q3)
SAO1.R8 "390k" RES-1206_M 203.834,74.8 r180 top (schematic designator R8)
SAO1.R9 "120k" RES-1206_M 213,75.8 r180 top (schematic designator R9)
SAO2.Q1 "BC848B" SOT23_N 204.094,60.475 r0 top (schematic designator Q1)
SAO2.Q3 "DMC3016LSD" SOIC-8_SOIC127P600X175-8N 212.024,60.381 r0 top (schematic designator Q3)
SAO2.R8 "390k" RES-1206_M 203.844,63.988 r180 top (schematic designator R8)
SAO2.R9 "120k" RES-1206_M 214.024,64.888 r180 top (schematic designator R9)
SP1.Q10 "BC848B" SOT23_N 30.458,89.412 r180 top (schematic designator Q10)
SP1.Q11 "BC848B" SOT23_N 30.458,96.371 r180 top (schematic designator Q11)
SP1.Q12 "DMC3016LSD" SOIC-8_SOIC127P600X175-8N 20.505,95.531 r180 top (schematic designator Q12)
SP1.Q13 "DMC3016LSD" SOIC-8_SOIC127P600X175-8N 20.505,88.797 r180 top (schematic designator Q13)
SP1.R11 "390k" RES-1206_M 34.172,89.412 r90 top (schematic designator R11)
SP1.R12 "390k" RES-1206_M 34.172,96.146 r90 top (schematic designator R12)
SP1.R17 "120k" RES-1206_M 26.696,96.146 r270 top (schematic designator R17)
SP1.R18 "120k" RES-1206_M 26.696,89.412 r270 top (schematic designator R18)
SP2.Q10 "BC848B" SOT23_N 30.458,73.822 r180 top (schematic designator Q10)
SP2.Q11 "BC848B" SOT23_N 30.458,80.782 r180 top (schematic designator Q11)
SP2.Q12 "DMC3016LSD" SOIC-8_SOIC127P600X175-8N 20.505,79.942 r180 top (schematic designator Q12)
SP2.Q13 "DMC3016LSD" SOIC-8_SOIC127P600X175-8N 20.505,73.207 r180 top (schematic designator Q13)
SP2.R11 "390k" RES-1206_M 34.172,73.822 r90 top (schematic designator R11)
SP2.R12 "390k" RES-1206_M 34.172,80.557 r90 top (schematic designator R12)
SP2.R17 "120k" RES-1206_M 26.696,80.557 r270 top (schematic designator R17)
SP2.R18 "120k" RES-1206_M 26.696,73.822 r270 top (schematic designator R18)
SP3.Q10 "BC848B" SOT23_N 55.733,89.403 r180 top (schematic designator Q10)
SP3.Q11 "BC848B" SOT23_N 55.733,96.363 r180 top (schematic designator Q11)
SP3.Q12 "DMC3016LSD" SOIC-8_SOIC127P600X175-8N 45.78,95.523 r180 top (schematic designator Q12)
SP3.Q13 "DMC3016LSD" SOIC-8_SOIC127P600X175-8N 45.78,88.788 r180 top (schematic designator Q13)
SP3.R11 "390k" RES-1206_M 59.447,89.403 r90 top (schematic designator R11)
SP3.R12 "390k" RES-1206_M 59.447,96.138 r90 top (schematic designator R12)
SP3.R17 "120k" RES-1206_M 51.971,96.138 r270 top (schematic designator R17)
SP3.R18 "120k" RES-1206_M 51.971,89.403 r270 top (schematic designator R18)
SP4.Q10 "BC848B" SOT23_N 55.735,73.812 r180 top (schematic designator Q10)
SP4.Q11 "BC848B" SOT23_N 55.735,80.772 r180 top (schematic designator Q11)
SP4.Q12 "DMC3016LSD" SOIC-8_SOIC127P600X175-8N 45.782,79.932 r180 top (schematic designator Q12)
SP4.Q13 "DMC3016LSD" SOIC-8_SOIC127P600X175-8N 45.782,73.197 r180 top (schematic designator Q13)
SP4.R11 "390k" RES-1206_M 59.449,73.812 r90 top (schematic designator R11)
SP4.R12 "390k" RES-1206_M 59.449,80.547 r90 top (schematic designator R12)
SP4.R17 "120k" RES-1206_M 51.973,80.547 r270 top (schematic designator R17)
SP4.R18 "120k" RES-1206_M 51.973,73.812 r270 top (schematic designator R18)
TRACO_1 "TRACO_12vto5.1_151121" TRACO_12VTO5.1_151121 121.454,154.45 r0 top
U2 "TCA9548APWR" FP-PW0024A-MFG 75.209,86 r0 top
VR1 "TS5205CX533" SOT-25 225.17,91.44 r0 top

## Footprints (in the part's own frame and the unit in brackets; to place one, negate y for a bottom-side part, rotate by r counter-clockwise, add the part's x,y. Pads: shape width x height; smd on the part's side, far side on the other; paste and mask are expansions set on the pad)
CAPAE9083X80M [mm] "Aluminum Electrolytic Capacitor, Case 8x6.5mm, Body 8.30x8.30x8.00mm, IPC Low Density; Support 4x5.5mm,5x5.5mm, 6.3x5.5mm, 6.3x6.3mm, 6.3x8mm"
  rect 5.35x1 smd: 1(-3.35,0) 2(3.35,0)
  silkscreen extent -6.05,-4.25 4.25,4.25, body extent -4.5,-4.25 4.5,4.25, height 8
CAPR5-4X5 [mm] "Capacitor; 2 Leads"
  rect 1.35x1.35 hole 0.8: 1(-2.5,0)
  round 1.35 hole 0.8: 2(2.5,0)
  silkscreen extent -1.69,-2 1.82,2
DHT22_HORIZONTAL [mil]
  round 0 hole 118.11 unplated: 0(0,931.1)
  rect 50x50 hole 30: 1(-150,0)
  round 50 hole 30: 2(-50,0) 3(50,0) 4(150,0)
  Keep-Out Layer circle w3.94: c0,931.1 r157.48
  silkscreen extent -300,36 300,1038, body extent -300,50 300,837, height 303
FP-PW0024A-MFG [mm]
  rrect22% 1.5x0.45 smd paste+0 mask+0: 1(-2.9,3.575) 2(-2.9,2.925) 3(-2.9,2.275) 4(-2.9,1.625) 5(-2.9,0.975) 6(-2.9,0.325) 7(-2.9,-0.325) 8(-2.9,-0.975) 9(-2.9,-1.625) 10(-2.9,-2.275) 11(-2.9,-2.925) 12(-2.9,-3.575) 13(2.9,-3.575) 14(2.9,-2.925) 15(2.9,-2.275) 16(2.9,-1.625) 17(2.9,-0.975) 18(2.9,-0.325) 19(2.9,0.325) 20(2.9,0.975) 21(2.9,1.625) 22(2.9,2.275) 23(2.9,2.925) 24(2.9,3.575)
  silkscreen extent -4.37,-3.95 1.78,3.95, body extent -3.75,-4.2 3.75,4.2, height 0.25
HDR1X2 [mm] "Connector; Header; 2 Position"
  rect 1.5x1.5 hole 0.9: 1(0,0)
  round 1.5 hole 0.9: 2(2.54,0)
  silkscreen extent -1.27,-1.27 3.81,1.27
HDR1X3 [mm] "Connector; Header; 3 Position"
  rect 1.5x1.5 hole 0.9: 1(0,0)
  round 1.5 hole 0.9: 2(2.54,0) 3(5.08,0)
  silkscreen extent -1.27,-1.27 6.35,1.27
HDR2X8 [mm] "Connector; Header; 8x2 Position"
  rect 1.5x1.5 hole 1.1: 1(0,0)
  round 1.5 hole 1.1: 2(0,2.54) 3(2.54,0) 4(2.54,2.54) 5(5.08,0) 6(5.08,2.54) 7(7.62,0) 8(7.62,2.54) 9(10.16,0) 10(10.16,2.54) 11(12.7,0) 12(12.7,2.54) 13(15.24,0) 14(15.24,2.54) 15(17.78,0) 16(17.78,2.54)
  silkscreen extent -1.27,-1.27 19.05,3.81
HDR2X9 [mm] "Connector; Header; 9x2 Position"
  rect 1.5x1.5 hole 1.1: 1(0,0)
  round 1.5 hole 1.1: 2(0,2.54) 3(2.54,0) 4(2.54,2.54) 5(5.08,0) 6(5.08,2.54) 7(7.62,0) 8(7.62,2.54) 9(10.16,0) 10(10.16,2.54) 11(12.7,0) 12(12.7,2.54) 13(15.24,0) 14(15.24,2.54) 15(17.78,0) 16(17.78,2.54) 17(20.32,0) 18(20.32,2.54)
  silkscreen extent -1.27,-1.27 21.59,3.81
HDR2X28 [mm] "Connector; Header; 28x2 Position"
  rect 1.5x1.5 hole 1.1: 1(0,0)
  round 1.5 hole 1.1: 2(0,2.54) 3(2.54,0) 4(2.54,2.54) 5(5.08,0) 6(5.08,2.54) 7(7.62,0) 8(7.62,2.54) 9(10.16,0) 10(10.16,2.54) 11(12.7,0) 12(12.7,2.54) 13(15.24,0) 14(15.24,2.54) 15(17.78,0) 16(17.78,2.54) 17(20.32,0) 18(20.32,2.54) 19(22.86,0) 20(22.86,2.54) 21(25.4,0) 22(25.4,2.54) 23(27.94,0) 24(27.94,2.54) 25(30.48,0) 26(30.48,2.54) 27(33.02,0) 28(33.02,2.54) 29(35.56,0) 30(35.56,2.54) 31(38.1,0) 32(38.1,2.54) 33(40.64,0) 34(40.64,2.54) 35(43.18,0) 36(43.18,2.54) 37(45.72,0) 38(45.72,2.54) 39(48.26,0) 40(48.26,2.54) 41(50.8,0) 42(50.8,2.54) 43(53.34,0) 44(53.34,2.54) 45(55.88,0) 46(55.88,2.54) 47(58.42,0) 48(58.42,2.54) 49(60.96,0) 50(60.96,2.54) 51(63.5,0) 52(63.5,2.54) 53(66.04,0) 54(66.04,2.54) 55(68.58,0) 56(68.58,2.54)
  silkscreen extent -1.27,-1.27 69.85,3.81
M3 [mm] "M3 Screw Mounting Hole, 6mm Head Diameter Clearance"
  round 0 hole 3.4 unplated: 0(0,0)
  Keep-Out Layer circle w0.1: c0,0 r4
PHOENIX_2PIN [mm]
  oval 2.5x3 hole 1.5: 1(-2.54,0) 2(2.54,0)
  silkscreen extent -5.08,-5.08 5.08,5.08
RES-1206_M [mm] "Chip Resistor, 2-Leads, Body 3.2x1.6mm, IPC Low Density, 0805 Compliant"
  rect 1.9x1.9 smd: 1(-1.25,0) 2(1.25,0)
  silkscreen extent -0.35,-1.25 0.35,1.25, body extent -1.65,-0.87 1.65,0.87, height 0.65
RPI_Z_GPIO_HDR2X20 [mm] "Connector; Header; 20x2 Position"
  round 1.524 hole 3 unplated: 0(-47.73,-53.13) 0(-47.73,4.87) 0(-21.73,4.87) 0(-21.73,-53.13) 0(1.27,-53.13) 0(1.27,4.87)
  rect 1.5x1.5 hole 0.9: 1(0,0)
  round 1.5 hole 0.9: 2(2.54,0) 3(0,-2.54) 4(2.54,-2.54) 5(0,-5.08) 6(2.54,-5.08) 7(0,-7.62) 8(2.54,-7.62) 9(0,-10.16) 10(2.54,-10.16) 11(0,-12.7) 12(2.54,-12.7) 13(0,-15.24) 14(2.54,-15.24) 15(0,-17.78) 16(2.54,-17.78) 17(0,-20.32) 18(2.54,-20.32) 19(0,-22.86) 20(2.54,-22.86) 21(0,-25.4) 22(2.54,-25.4) 23(0,-27.94) 24(2.54,-27.94) 25(0,-30.48) 26(2.54,-30.48) 27(0,-33.02) 28(2.54,-33.02) 29(0,-35.56) 30(2.54,-35.56) 31(0,-38.1) 32(2.54,-38.1) 33(0,-40.64) 34(2.54,-40.64) 35(0,-43.18) 36(2.54,-43.18) 37(0,-45.72) 38(2.54,-45.72) 39(0,-48.26) 40(2.54,-48.26)
  silkscreen extent -51.23,-76.63 4.77,8.37, body extent -26.52,-56.63 4.71,8.37, height 13.35
SOIC-8_SOIC127P600X175-8N [mm] "SOIC, 8-Leads, Body 4.90x3.90mm, Pitch 1.27mm, IPC Medium Density"
  oval 1.55x0.6 smd: 1(-2.7,1.905) 2(-2.7,0.635) 3(-2.7,-0.635) 4(-2.7,-1.905) 5(2.7,-1.905) 6(2.7,-0.635) 7(2.7,0.635) 8(2.7,1.905)
  silkscreen extent -2.82,-2.5 1.6,2.88, body extent -3,-2.5 3,2.5, height 1.75
SOT23_N [mm] "SOT23, 3-Leads, Body 2.9x1.3 mm, Pitch 0.95 mm, IPC Medium Density"
  rect 1.05x0.6 smd: 1(-1.15,0.95) 2(-1.15,-0.95) 3(1.15,0)
  silkscreen extent -1.27,-1.5 0.7,1.92, body extent -0.7,-1.5 0.7,1.5, height 1.1
SOT-25 [mm] "SOT25, 5-Leads, Body 2.90x2.70mm, Pitch 0.95mm, IPC Medium Density"
  rect 0.95x0.6 smd: 1(-1.375,0.95) 2(-1.375,0) 3(-1.375,-0.95) 4(1.375,-0.95) 5(1.375,0.95)
  silkscreen extent -1.5,-1.55 0.5,1.92, body extent -1.5,-1.55 1.5,1.55, height 1.25
TRACO_12VTO5.1_151121 [mil]
  rect 90x90 hole 60: 1(-400,100)
  round 90 hole 60: 2(400,400) 3(-400,-100) 4(400,-400)
  silkscreen extent -1000,-500 1000,500, body extent -1000,-500 1000,500, height 402

## Part data
C1 C2 C3 C4 C5 C6 C7 C8 C9 C10 C11 C12 C13 C14 C15 C17 C18 C22 C23 C24 C25 C29 C31: library part "Cap Pol1", "Capacitor", PackageDescription="Polarized Capacitor; 2 Leads", Publisher="Altium Limited"
  C1 C2 C4 C6 C17: Link=https://au.rs-online.com/web/p/ceramic-multilayer-capacitors/6995137/, Published=23-Sep-02
  C3 C5 C7 C15 C18 C22 C25: Published=23-Sep-2002
  C8 C9 C10 C11 C12 C13 C29: Link=https://au.rs-online.com/web/p/aluminium-capacitors/2244325/, Published=23-Sep-02
  C14 C23 C24: Link=https://au.rs-online.com/web/p/aluminium-capacitors/1918277/, Published=23-Sep-02
  C31: Published=23-Sep-02
C28 C30: library part "Cap Semi", "Capacitor (Semiconductor SIM Model)", LatestRevisionDate=29-May-2009, LatestRevisionNote="IPC-7351 Footprint Added.", PackageDescription="Chip Capacitor", Published=8-Jun-2000, Publisher="Altium Limited"
  C28: PackageReference=C0805
  C30: PackageReference=C1206
H_ACOMS H_AIO H_ASW2P H_PSW H_TCA: library part "Header 8X2", "Header, 8-Pin, Dual row", LatestRevisionDate=17-Jul-2002, LatestRevisionNote="Re-released for DXP Platform.", Publisher="Altium Limited", System=Connector
H_ASW1: library part "Header 28X2", "Header, 28-Pin, Dual row", LatestRevisionDate=17-Jul-2002, LatestRevisionNote="Re-released for DXP Platform.", Publisher="Altium Limited", System=Connector
H_PIO: library part "Header 9X2", "Header, 9-Pin, Dual row", LatestRevisionDate=17-Jul-2002, LatestRevisionNote="Re-released for DXP Platform.", Publisher="Altium Limited", System=Connector
ISA1.Q2 ISA2.Q2 ISA3.Q2 ISA4.Q2 SA1.Q12 SA1.Q13 SA2.Q12 SA2.Q13 SA3.Q12 SA3.Q13 SA4.Q12 SA4.Q13 SA5.Q12 SA5.Q13 SA6.Q12 SA6.Q13 SA7.Q12 SA7.Q13 SA8.Q12 SA8.Q13 SA9.Q12 SA9.Q13 SA10.Q12 SA10.Q13 SA11.Q12 SA11.Q13 SA12.Q12 SA12.Q13 SA13.Q12 SA13.Q13 SA14.Q12 SA14.Q13 SAO1.Q3 SAO2.Q3 SP1.Q12 SP1.Q13 SP2.Q12 SP2.Q13 SP3.Q12 SP3.Q13 SP4.Q12 SP4.Q13: "MOSFET N/P-CH 30V 8.2A/6.2A 8SO", Case/Package=SOIC, Continuous Drain Current (ID)=6.2A, Drain to Source Breakdown Voltage=30V, Drain to Source Resistance=30mR, Gate to Source Voltage (Vgs)=20V, Input Capacitance=1.415nF, Manufacturer=Diodes, Manufacturer Part Number=DMC3016LSD-13, Max Operating Temperature=150°C, Max Power Dissipation=1.2W, Min Operating Temperature=-55°C, Package Quantity=2500, Category=MOSFETs, ComponentLink1Description=http://www.mouser.com/ds/2/115/DMC3016LSD-364397.pdf?src-supplier=Mouser, ComponentLink1URL=http://www.mouser.com/ds/2/115/DMC3016LSD-364397.pdf?src-supplier=Mouser, ComponentLink2Description=https://www.diodes.com/assets/Datasheets/DMC3016LSD.pdf?src-supplier=Digi-Key, ComponentLink2URL=https://www.diodes.com/assets/Datasheets/DMC3016LSD.pdf?src-supplier=Digi-Key, Drain to Source Voltage (Vdss)=30V, Fall Time=40.4ns, FET Type="N and P-Channel", Lead Free="Lead Free", Mount="Surface Mount", Number of Channels=2, Number of Pins=8, Packaging="Tape and Reel", Rds On Max=16mR, Rise Time=17.1ns, RoHS=Yes, RoHS Compliant=Yes, Turn-Off Delay Time=60.5ns, Turn-On Delay Time=9.7ns, Weight=0.00261oz
ISA1.Q6 ISA2.Q6 ISA3.Q6 ISA4.Q6 Q4 SA1.Q10 SA1.Q11 SA2.Q10 SA2.Q11 SA3.Q10 SA3.Q11 SA4.Q10 SA4.Q11 SA5.Q10 SA5.Q11 SA6.Q10 SA6.Q11 SA7.Q10 SA7.Q11 SA8.Q10 SA8.Q11 SA9.Q10 SA9.Q11 SA10.Q10 SA10.Q11 SA11.Q10 SA11.Q11 SA12.Q10 SA12.Q11 SA13.Q10 SA13.Q11 SA14.Q10 SA14.Q11 SAO1.Q1 SAO2.Q1 SP1.Q10 SP1.Q11 SP2.Q10 SP2.Q11 SP3.Q10 SP3.Q11 SP4.Q10 SP4.Q11: "NPN Silicon AF Transistor, 30 V VCEO, 100 mA IC, SOT23, Reel, Green", Manufacturer=Infineon, ComponentLink1Description="Manufacturer URL", ComponentLink1URL=http://www.infineon.com/, ComponentLink2Description=Datasheet, ComponentLink2URL=http://www.infineon.com/dgdl/bc847series_bc848series_bc849series_bc850series.pdf?folderId=db3a304314dca389011541d30fa21656&fileId=db3a304314dca389011541d4630a1657, ComponentLink3Description="Package Specification", ComponentLink3URL=http://www.infineon.com/dgdl/SOT23-Package_Overview.pdf?folderId=db3a30431936bc4b0119532290053c66&fileId=db3a30431936bc4b0119533468123c85, fT (typ)="250 MHz", Green=TRUE, IBM (max)="200 mA", IC (max)="100 mA", ICBO (max)="15 nA", ICM (max)="200 mA", Mounting Technology="Surface Mount", PackageDescription="3-Pin Small Outline Transistor Package, 1.3 x 2.9 mm Body, 0.95 mm Pitch", PackageReference=SOT23, PackageVersion=Apr-08, Packing=Reel, PartNumber=BC848B, Polarity=NPN, Ptot (max)="330 mW", VCBO (max)="30 V", VCEO (max)="30 V", VEBO (max)="6 V"
ISA1.Q8 ISA2.Q8 ISA3.Q8 ISA4.Q8: library part MOSFET-P, "NTR1P02T1G P-channel MOSFET Transistor; 1 A; 20 V; 3-Pin SOT-23", Case/Package=SOT-23-3, Continuous Drain Current (ID)=1A, Current Rating=-1A, Drain to Source Breakdown Voltage=-20V, Drain to Source Resistance=148mR, Drain to Source Voltage (Vdss)=20V, Input Capacitance=165pF, Manufacturer="ON Semiconductor", Max Operating Temperature=150°C, Max Power Dissipation=400mW, Min Operating Temperature=-55°C, On-State Resistance=148MR, Package Quantity=1, Threshold Voltage=-1.9V, Category=MOSFETs, ComponentLink1Description=https://datasheet.ciiva.com/22641/1708311-22641684.pdf?src-supplier=Element14, ComponentLink1URL=https://datasheet.ciiva.com/22641/1708311-22641684.pdf?src-supplier=Element14, ComponentLink2Description=https://datasheet.ciiva.com/936/ntr1p02t1-d-936864.pdf?src-supplier=Digi-Key, ComponentLink2URL=https://datasheet.ciiva.com/936/ntr1p02t1-d-936864.pdf?src-supplier=Digi-Key, ComponentLink3Description=https://datasheet.ciiva.com/22641/1708311-22641686.pdf?src-supplier=Element14, ComponentLink3URL=https://datasheet.ciiva.com/22641/1708311-22641686.pdf?src-supplier=Element14, ComponentLink4Description=https://datasheet.ciiva.com/16386/ntr1p02t1-d-16386335.pdf?src-supplier=Future+Electronics, ComponentLink4URL=https://datasheet.ciiva.com/16386/ntr1p02t1-d-16386335.pdf?src-supplier=Future+Electronics, ComponentLink5Description=https://datasheet.ciiva.com/26145/ntr1p02t1-d-26145674.pdf?src-supplier=Avnet+Europe, ComponentLink5URL=https://datasheet.ciiva.com/26145/ntr1p02t1-d-26145674.pdf?src-supplier=Avnet+Europe, ComponentLink6Description=https://datasheet.ciiva.com/11168/ntr1p02t1-d-11168174.pdf?src-supplier=Avnet, ComponentLink6URL=https://datasheet.ciiva.com/11168/ntr1p02t1-d-11168174.pdf?src-supplier=Avnet, ComponentLink7Description=https://datasheet.ciiva.com/936/ntr1p02t1-d-936865.pdf?src-supplier=Digi-Key, ComponentLink7URL=https://datasheet.ciiva.com/936/ntr1p02t1-d-936865.pdf?src-supplier=Digi-Key, Contact Plating=Tin,Matte, Element Configuration=Single, Fall Time=9ns, Gate to Source Voltage (Vgs)=20V, Height=0.94mm, Lead Free="Lead Free", Length=2.9mm, Manufacturer Part Number=NTR1P02, Nominal Vgs=-1.9V, Number of Elements=1, Number of Pins=3, Packaging="Tape and Reel", Power Dissipation=400mW, Radiation Hardening=No, Rds On Max=180mR, REACH SVHC="No SVHC", Rise Time=9ns, RoHS=Yes, RoHS Compliant=Yes, Turn-Off Delay Time=9ns, Turn-On Delay Time=7ns, Voltage Rating (DC)=-20V, Width=1.3mm
ISA1.R13 ISA1.R14 ISA1.R15 ISA2.R13 ISA2.R14 ISA2.R15 ISA3.R13 ISA3.R14 ISA3.R15 ISA4.R13 ISA4.R14 ISA4.R15 R1 R2 R3 R4 R5 R6 R7 R10 R16 R16D R16U R19 R20 R21 R22 R23 R24 SA1.R11 SA1.R12 SA1.R17 SA1.R18 SA2.R11 SA2.R12 SA2.R17 SA2.R18 SA3.R11 SA3.R12 SA3.R17 SA3.R18 SA4.R11 SA4.R12 SA4.R17 SA4.R18 SA5.R11 SA5.R12 SA5.R17 SA5.R18 SA6.R11 SA6.R12 SA6.R17 SA6.R18 SA7.R11 SA7.R12 SA7.R17 SA7.R18 SA8.R11 SA8.R12 SA8.R17 SA8.R18 SA9.R11 SA9.R12 SA9.R17 SA9.R18 SA10.R11 SA10.R12 SA10.R17 SA10.R18 SA11.R11 SA11.R12 SA11.R17 SA11.R18 SA12.R11 SA12.R12 SA12.R17 SA12.R18 SA13.R11 SA13.R12 SA13.R17 SA13.R18 SA14.R11 SA14.R12 SA14.R17 SA14.R18 SAO1.R8 SAO1.R9 SAO2.R8 SAO2.R9 SP1.R11 SP1.R12 SP1.R17 SP1.R18 SP2.R11 SP2.R12 SP2.R17 SP2.R18 SP3.R11 SP3.R12 SP3.R17 SP3.R18 SP4.R11 SP4.R12 SP4.R17 SP4.R18: library part Res2, "Resistor", LatestRevisionDate=17-Jul-2002, LatestRevisionNote="Re-released for DXP Platform.", PackageDescription="Chip Resistor 1206 Case Size", PackageReference=1206, Published=8-Jun-2000, Publisher="Altium Limited"
J1: library part "Header 3", "Header, 3-Pin / ISA1 (D10), Inverted Switch 12V-5V Select", LatestRevisionDate=17-Jul-2002, LatestRevisionNote="Re-released for DXP Platform.", Publisher="Altium Limited"
J2: library part "Header 3", "Header, 3-Pin / ISA2 (D11), Inverted Switch 12V-5V Select", LatestRevisionDate=17-Jul-2002, LatestRevisionNote="Re-released for DXP Platform.", Publisher="Altium Limited"
J3: library part "Header 3", "Header, 3-Pin / ISA3 (D12), Inverted Switch 12V-5V Select", LatestRevisionDate=17-Jul-2002, LatestRevisionNote="Re-released for DXP Platform.", Publisher="Altium Limited"
J4: library part "Header 3", "Header, 3-Pin / ISA4 (D13), Inverted Switch 12V-5V Select", LatestRevisionDate=17-Jul-2002, LatestRevisionNote="Re-released for DXP Platform.", Publisher="Altium Limited"
J5: "Header, 3-Pin / SAO1 (D8), 12V 5V Select", LatestRevisionDate=17-Jul-2002, LatestRevisionNote="Re-released for DXP Platform.", Publisher="Altium Limited"
J6: "Header, 3-Pin / SAO2 (D9), 12V 5V Select", LatestRevisionDate=17-Jul-2002, LatestRevisionNote="Re-released for DXP Platform.", Publisher="Altium Limited"
J7: "Header, 2-Pin / Arduino->RPI Power", LatestRevisionDate=17-Jul-2002, LatestRevisionNote="Re-released for DXP Platform.", Publisher="Altium Limited"
J8: "Header, 3-Pin / RPI, 5V or 3V Power", LatestRevisionDate=17-Jul-2002, LatestRevisionNote="Re-released for DXP Platform.", Publisher="Altium Limited"
J9 J10: "Header, 3-Pin", LatestRevisionDate=17-Jul-2002, LatestRevisionNote="Re-released for DXP Platform.", Publisher="Altium Limited"
J11: "Header, 2-Pin / VSense, HS", LatestRevisionDate=17-Jul-2002, LatestRevisionNote="Re-released for DXP Platform.", Publisher="Altium Limited"
J12: "Header, 2-Pin / VSense, LS", LatestRevisionDate=17-Jul-2002, LatestRevisionNote="Re-released for DXP Platform.", Publisher="Altium Limited"
Jd1: library part "Header 3", "12V and 5v Tie in Ground", LatestRevisionDate=17-Jul-2002, LatestRevisionNote="Re-released for DXP Platform.", Publisher="Altium Limited"
JW1: "Header, 2-Pin, Optional short to GND for PFET", LatestRevisionDate=17-Jul-2002, LatestRevisionNote="Re-released for DXP Platform.", Publisher="Altium Limited"
MH1 MH2 MH3 MH4 MH5 MH6 MH7 MH8 MH10 MH11 MH12: "M3 Mounting Hole"
P1: library part Phoenix_2pin, "Plug IN"
Q5 Q7: "MOSFET 2P-CH 30V 6A SO-8, VgMax=20V, Max Drain Resistance (38 mΩ)", Case/Package=SOIC, Continuous Drain Current (ID)=6A, Drain to Source Voltage (Vdss)=30V, Input Capacitance=1.241nF, Manufacturer=Diodes, Manufacturer Part Number=DMP3028LSD-13, Max Operating Temperature=150°C, Max Power Dissipation=1.3W, Min Operating Temperature=-55°C, Category=MOSFETs, ComponentLink1Description=http://www.mouser.com/ds/2/115/DMP3028LSD-776487.pdf?src-supplier=Mouser, ComponentLink1URL=http://www.mouser.com/ds/2/115/DMP3028LSD-776487.pdf?src-supplier=Mouser, ComponentLink2Description=https://www.diodes.com/assets/Datasheets/DMP3028LSD.pdf?src-supplier=Digi-Key, ComponentLink2URL=https://www.diodes.com/assets/Datasheets/DMP3028LSD.pdf?src-supplier=Digi-Key, Mount="Surface Mount", Packaging="Tape and Reel", Rds On Max=25mR, RoHS=Yes, RoHS Compliant=Yes
Rpi_GPIO1: library part Rpi_GPIO_1, "Header, 20-Pin, Dual row", LatestRevisionDate=17-Jul-2002, LatestRevisionNote="Re-released for DXP Platform.", Publisher="Altium Limited"
TRACO_1: "TRACOPOWER TEL 15 15W Isolated DC-DC Converter Through Hole, Voltage in 9 → 18 V dc, Voltage out 5.1V dc", Supplier Part Number 1=495-TEL-15-1211, Link=https://au.rs-online.com/web/p/isolated-dc-dc-converters/1665605/, Supplier 1=Mouser, Supplier 2=RSComponents, Supplier 3=RSComponents, Supplier 4=RSComponents, Supplier Part Number 2=5106046, Supplier Part Number 3=5106046P, Supplier Part Number 4=1665605
U2: library part CMP-04892-000002-1, "IC I2C SW 8CH W/RESET 24TSSOP", Ambient Temperature Range High=+85°C, Ambient Temperature Range Low=-40°C, Manufacturer="Texas Instruments", Max Supply Voltage=5.5V, Min Supply Voltage=1.65V, Nominal Supply Current=2-50uA, Package=PW0024A, Temperature="-40°C to +85°C", Automotive=No, Category=IC, ComponentLink2Description=Datasheet, ComponentLink2URL=http://www.ti.com/lit/ds/symlink/tca9548a.pdf, Device Class L1="Integrated Circuits (ICs)", Device Class L2="Interface ICs", Device Class L3=Multiplexers, Digikey Description="IC I2C SW 8CH W/RESET 24TSSOP", Height=1.2mm, Interface=I2C,SMBus, Ipc Land Pattern Name=SOP65P640X120-24, Lead Free=Yes, Manufacturer Part Number=TCA9548APWR, Mouser Description="Low-Voltage 8-Channel I2C Switch With Reset 24-TSSOP -40 to 85", Mux Demux Ratio=1:8, Number Of Circuits=1, Octopart=https://octopart.com/tca9548apwr-texas+instruments-22266789, RoHS=TRUE, Standoff Height=0.05mm, Temperature Range High=+85°C, Temperature Range Low=-40°C
VR1: library part TS5205, "150mA Low Noise LDO Voltage Regulator with Enable Function", PackageReference=SOT-25

## Free pads (board coordinates)
  round 0 hole 2 unplated: 0(29.354,152.71) 0(41.704,152.7) 0(47.274,175.79) 0(54.354,152.7) 0(67.594,175.79) 0(68.894,152.7) 0(84.664,152.7)
  round 0.9 hole 0.9 unplated mask+0: 0(190.563,160.48)